# Altium PCB ESC.PcbDoc
Units mm, origin at the board's own origin, x right, y up, seen from the top; angles counter-clockwise.
Board outline 52.2 x 43.55 mm, 2 copper layers (TL, BL), stack 0.872 mm thick; 68 components, 44 nets, 233 pads, 305 vias.
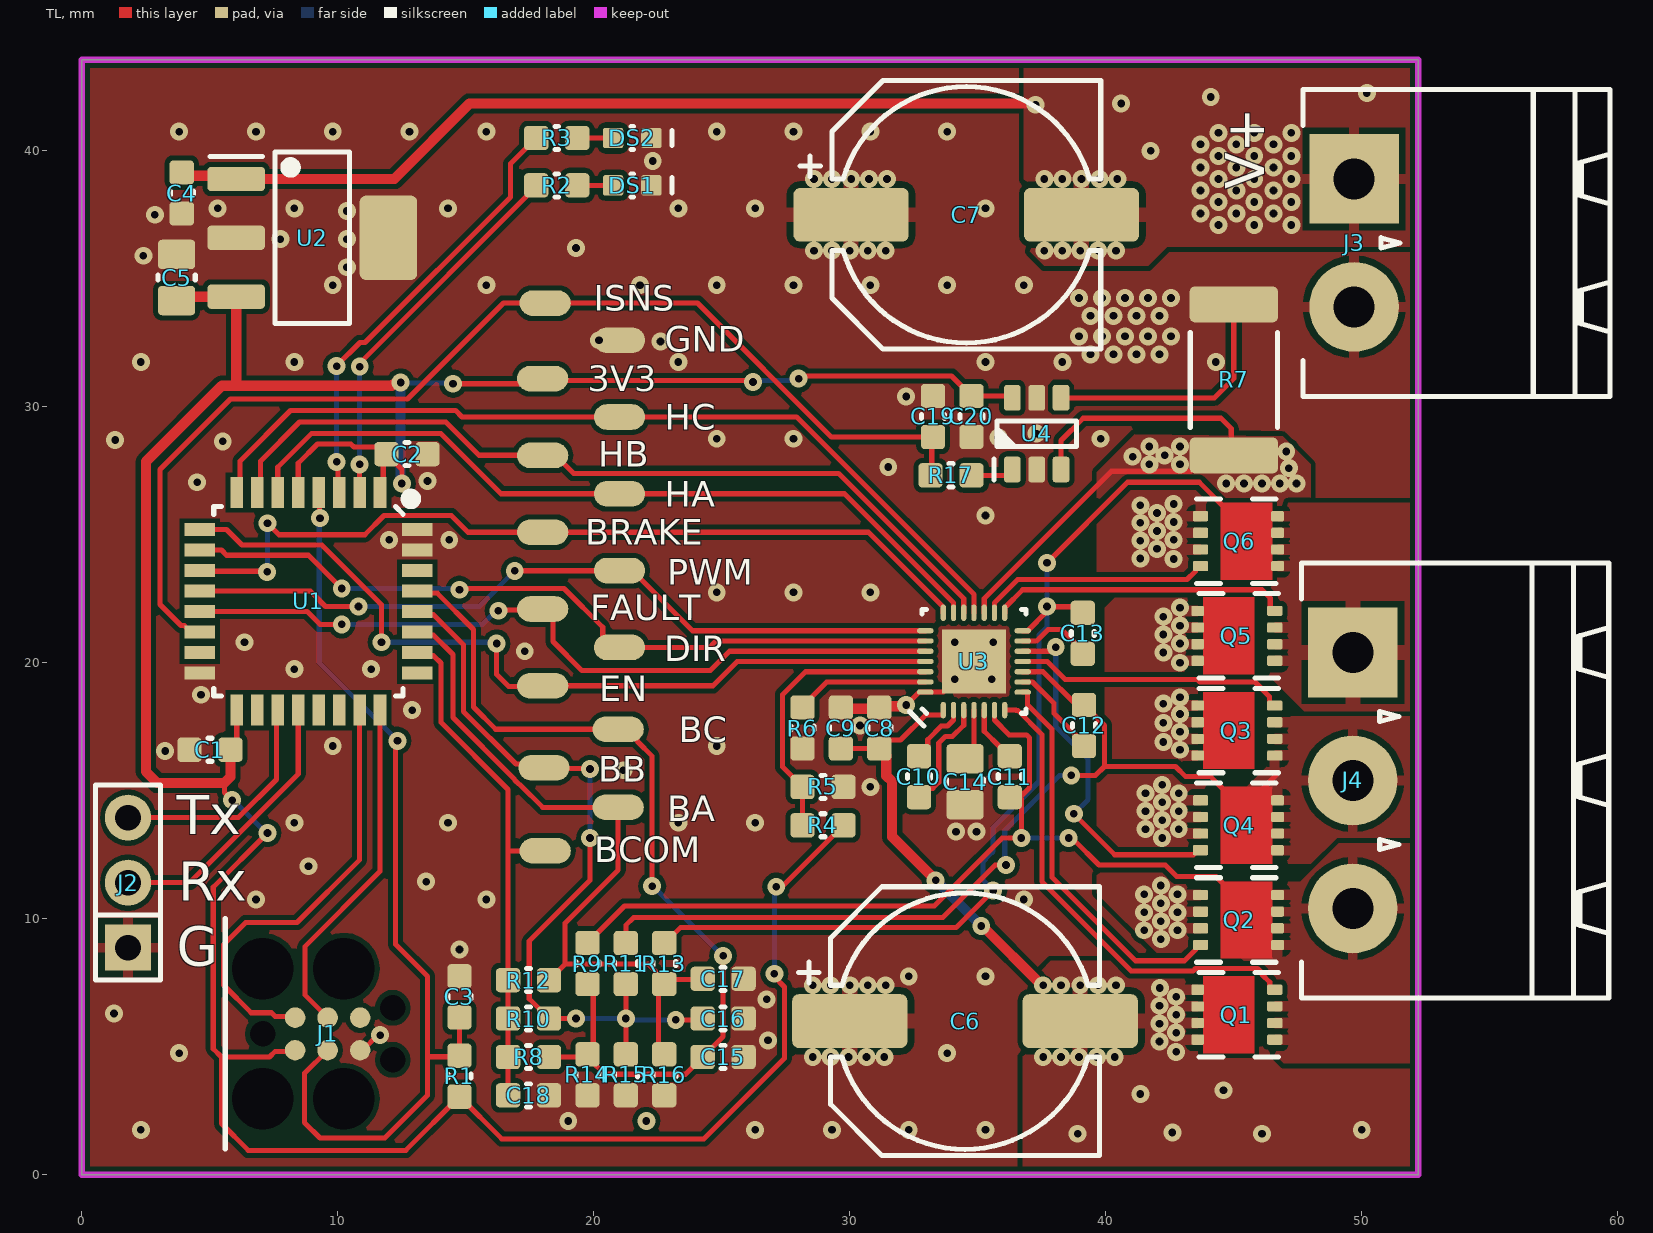
[diagram p0: TL view]
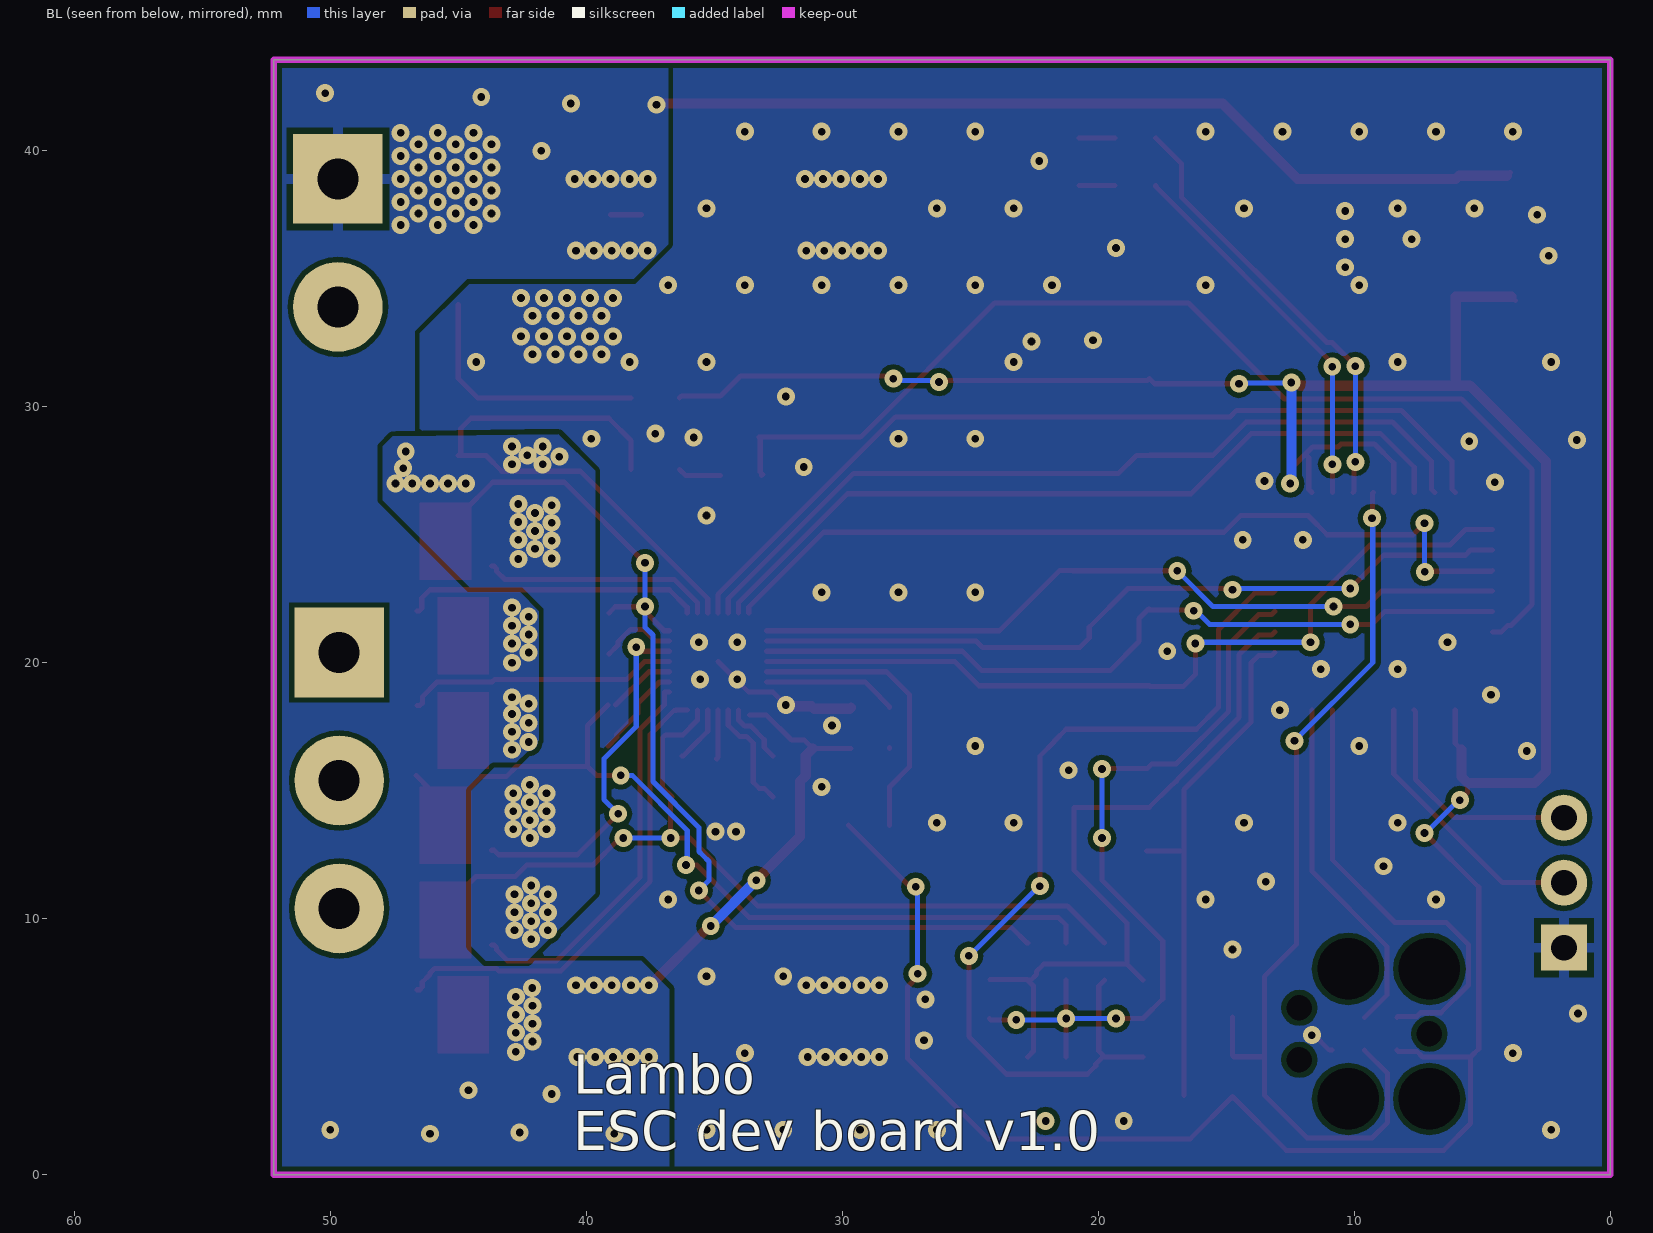
[diagram p1: BL view, seen from below]
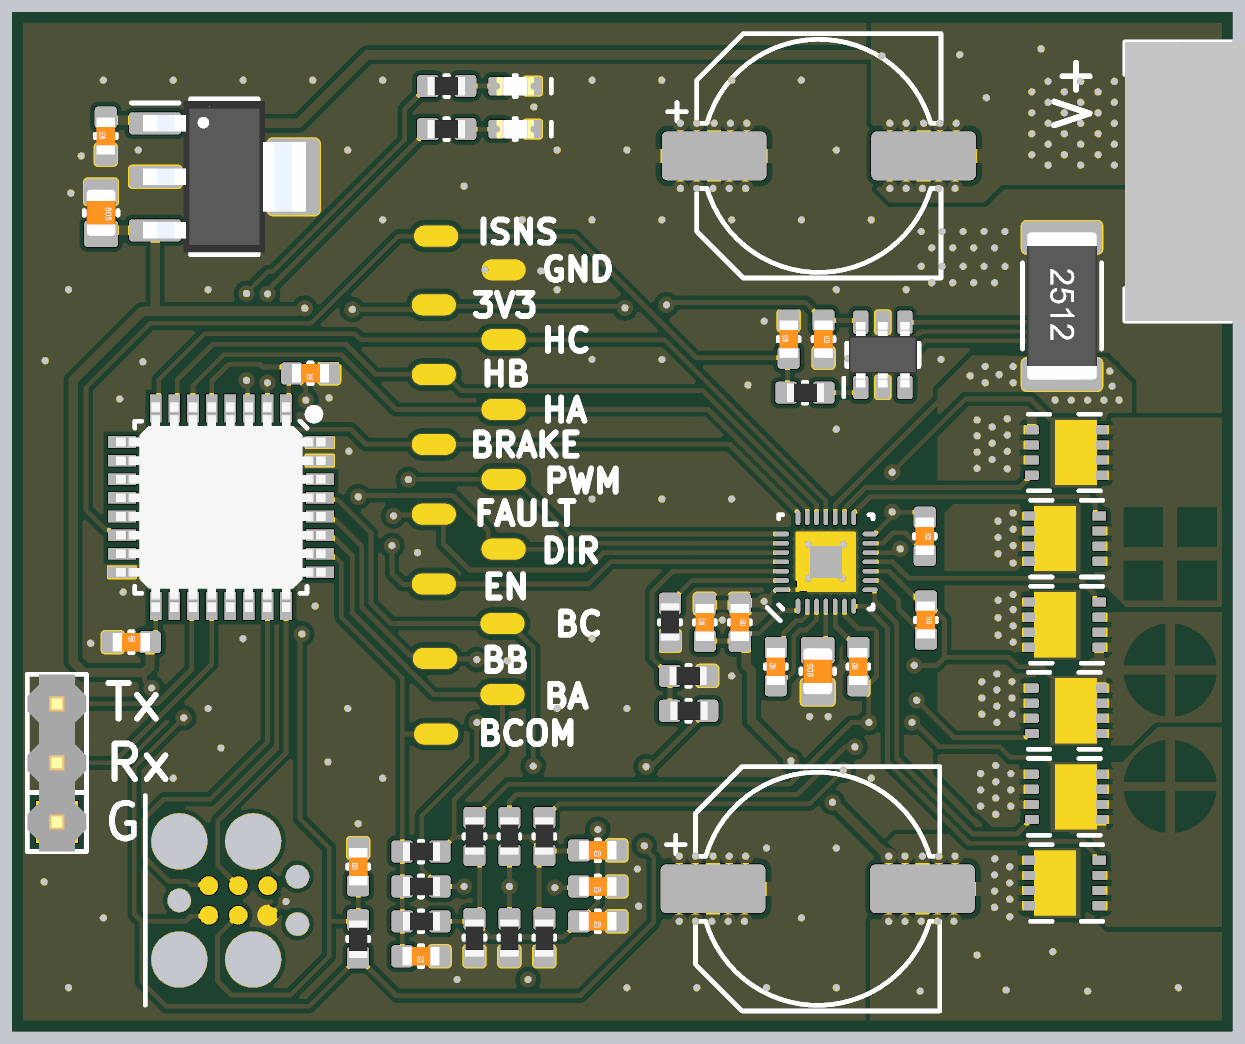
[diagram p2: 3D render of the assembled board from above, using the file's embedded part models]

## Layer stack, top to bottom
Top Solder: solder mask 0.01, Solder Resist, Dk 3.5
TL: signal copper 0.036
Dielectric 4: prepreg 0.8, FR-4, Dk 4.2
BL: signal copper 0.036
Bottom Solder: solder mask 0.01, Solder Resist, Dk 3.5

## Board outline
0,0 0,43.55 52.2,43.55 52.2,0

## Design rules (kind name [scope] priority, off if disabled: settings)
Clearance [All] p1: gap=0.2 ignorepadtopadclearanceinfootprint=FALSE except(0: Arc-Hole Track-Hole SMDPad-Hole THPad-Hole Via-Hole Fill-Hole Poly-Hole Region-Hole Text-Hole)
DiffPairsRouting DiffPairsRouting_1 [InDifferentialPair('D')] p1: maxlimit=0.4 minlimit=0.2 mostfreqgap=0.2 toplayer_minwidth=0.2 toplayer_maxwidth=0.4 toplayer_prefwidth=0.4 bottomlayer_minwidth=0.2 bottomlayer_maxwidth=0.4 bottomlayer_prefwidth=0.4 maxuncoupledlength=12.7
DiffPairsRouting [All] p2: maxlimit=0.254 minlimit=0.254 mostfreqgap=0.254 toplayer_minwidth=0.381 toplayer_maxwidth=0.381 toplayer_prefwidth=0.381 bottomlayer_minwidth=0.381 bottomlayer_maxwidth=0.381 bottomlayer_prefwidth=0.381 maxuncoupledlength=12.7
HoleSize [All] p1: absolutevalues=TRUE maxlimit=10 minlimit=0.3 maxpercent=80.000 minpercent=20.000
MinimumSolderMaskSliver MinimumSolderMaskSliver_1 [HasFootprint('QFN65P400X400X90_HS-16N')] p1: minsoldermaskwidth=0.08
MinimumSolderMaskSliver [All] p2: minsoldermaskwidth=0.1
PolygonConnect [All] p1: thpad.connectstyle=Relief thpad.reliefconductorwidth=0.4 thpad.reliefentries=4 thpad.polygonreliefangle="90 Angle" thpad.airgapwidth=0.254 smdpad.connectstyle=Direct smdpad.reliefconductorwidth=0.254 smdpad.reliefentries=4 smdpad.polygonreliefangle="90 Angle" smdpad.airgapwidth=0.254 via.connectstyle=Direct via.reliefconductorwidth=0.254 via.reliefentries=4 via.polygonreliefangle="90 Angle" via.airgapwidth=0.254
RoutingVias [All] p1: holewidth=0.3 width=0.7 viastyle="Through Hole" minholewidth=0.3 minwidth=0.5 maxholewidth=1 maxwidth=2
SilkToSilkClearance [All] p1: silktosilkclearance=0
SilkToSolderMaskClearance [IsPad] p1: minsilkscreentomaskgap=0.1 clearancetoexposedcopper=TRUE
SolderMaskExpansion [All] p1: expansion=0.05 istentingtop=FALSE
Width [All] p1: maxlimit=10 minlimit=0.2 preferedwidth=0.254
25 further rules are at their usual default settings.

## Classes and differential pairs
component class MCU: 3V3 BA BB BC BCOM BRAKE C1 C2 C3 C4 C5 DIR DS1 DS2 EN FAULT GND HA HB HC ISNS J1 J2 PWM R1 R2 R3 U2
component class ESC: C6 C7 C8 C9 C10 C11 C12 C13 C14 C15 C16 C17 C18 C19 C20 J3 J4 Q1 Q2 Q3 Q4 Q5 Q6 R4 R5 R6 R7 R8 R9 R10 R11 R12 R13 R14 R15 R16 R17 U3 U4

## Components (designator, comment, footprint, x,y, rotation, side; value= is the part's Value field where it differs from the comment)
3V3 "TP_SMT" TP_100X200 18,31.1 r180 top (schematic designator TP_3V3)
BA "TP_SMT" TP_100X200 20.95,14.35 r180 top (schematic designator TP_BA)
BB "TP_SMT" TP_100X200 18.05,15.9 r180 top (schematic designator TP_BB)
BC "TP_SMT" TP_100X200 20.95,17.4 r0 top (schematic designator TP_BC)
BCOM "TP_SMT" TP_100X200 18.1,12.65 r180 top (schematic designator TP_BCOM)
BRAKE "TP_SMT" TP_100X200 18,25.1 r180 top (schematic designator TP_BRAKE)
C1 "100nF,50V" CAPC1608X09N_0603 5,16.6 r0 top
C2 "100nF,50V" CAPC1608X09N_0603 12.7,28.15 r180 top
C3 "100nF,50V" CAPC1608X09N_0603 14.75,6.95 r90 top
C4 "1uF,50V" CAPC1608X09N_0603 3.9,38.35 r90 top
C5 "10uF,16V" CAPC2012X12N_0805 3.7,35.05 r270 top
C6 "100uF,63V" CAPAE1030X1020N 34.5,6 r0 top
C7 "100uF,63V" CAPAE1030X1020N 34.55,37.5 r0 top
C8 "1uF,50V" CAPC1608X09N_0603 31.15,17.45 r270 top
C9 "100nF,50V" CAPC1608X09N_0603 29.65,17.45 r90 top
C10 "470nF,50v" CAPC1608X09N_0603 32.7,15.55 r90 top
C11 "100nF,50V" CAPC1608X09N_0603 36.25,15.55 r90 top
C12 "100nF,50V" CAPC1608X09N_0603 39.15,17.55 r270 top
C13 "100nF,50V" CAPC1608X09N_0603 39.1,21.15 r270 top
C14 "10uF,16V" CAPC2012X12N_0805 34.5,15.35 r90 top
C15 "100pF,50V" CAPC1608X09N_0603 25.05,4.6 r180 top
C16 "100pF,50V" CAPC1608X09N_0603 25.05,6.1 r180 top
C17 "100pF,50V" CAPC1608X09N_0603 25.05,7.65 r180 top
C18 "100pF,50V" CAPC1608X09N_0603 17.45,3.1 r180 top
C19 "100nF,50V" CAPC1608X09N_0603 33.25,29.622 r90 top
C20 "100nF,50V" CAPC1608X09N_0603 34.75,29.622 r270 top
DIR "TP_SMT" TP_100X200 21,20.6 r180 top (schematic designator TP_DIR)
DS1 "GRN-0603" LED_SML-LX0603 21.5,38.65 r180 top
DS2 "GRN-0603" LED_SML-LX0603 21.5,40.5 r180 top
EN "TP_SMT" TP_100X200 18,19.1 r180 top (schematic designator TP_EN)
FAULT "TP_SMT" TP_100X200 18,22.1 r0 top (schematic designator TP_FAULT)
GND "TP_SMT" TP_100X200 21,32.6 r180 top (schematic designator TP_GND)
HA "TP_SMT" TP_100X200 21,26.6 r180 top (schematic designator TP_HA)
HB "TP_SMT" TP_100X200 18,28.1 r180 top (schematic designator TP_HB)
HC "TP_SMT" TP_100X200 21,29.6 r180 top (schematic designator TP_HC)
ISNS "TP_SMT" TP_100X200 18.1,34.05 r180 top (schematic designator TP_ISNS)
J1 "" TAG-CONNECT_TC2030-IDC 9.6,5.5 r0 top
J2 "HEADER 1X3" HIROSE_A2-3PA-2.54DSA 1.8,11.41 r180 top
J3 "OSTOQ027151" ONSHORE_OSTOQ027151 53.7,36.4 r90 top
J4 "OSTOQ037151" ONSHORE_OSTOQ037151 59.65,15.4 r90 top
PWM "TP_SMT" TP_100X200 21,23.6 r180 top (schematic designator TP_PWM)
Q1 "RQ3E100BNTB" ROHM-HSMT8 45.2,6.25 r180 top
Q2 "RQ3E100BNTB" ROHM-HSMT8 45.1,9.95 r0 top
Q3 "RQ3E100BNTB" ROHM-HSMT8 45.2,17.35 r180 top
Q4 "RQ3E100BNTB" ROHM-HSMT8 45.1,13.65 r0 top
Q5 "RQ3E100BNTB" ROHM-HSMT8 45.2,21.05 r180 top
Q6 "RQ3E100BNTB" ROHM-HSMT8 45.1,24.75 r0 top
R1 "10K,1%" RESC1608X06N_0603 14.75,3.85 r270 top
R2 "470R,1%" RESC1608X06N_0603 18.55,38.65 r180 top
R3 "470R,1%" RESC1608X06N_0603 18.55,40.5 r180 top
R4 "220K,1%" RESC1608X06N_0603 28.95,13.65 r0 top
R5 "100K,1%" RESC1608X06N_0603 28.95,15.15 r180 top
R6 "220K,1%" RESC1608X06N_0603 28.15,17.45 r90 top
R7 "1R2,5%" RESC6432X07N_2512 45,31.05 r270 top
R8 "47K, 1%" RESC1608X06N_0603 17.45,4.6 r0 top
R9 "47K, 1%" RESC1608X06N_0603 19.75,8.25 r90 top
R10 "47K, 1%" RESC1608X06N_0603 17.45,6.1 r0 top
R11 "47K, 1%" RESC1608X06N_0603 21.25,8.25 r90 top
R12 "47K, 1%" RESC1608X06N_0603 17.45,7.6 r0 top
R13 "47K, 1%" RESC1608X06N_0603 22.75,8.25 r90 top
R14 "10K,1%" RESC1608X06N_0603 19.75,3.9 r270 top
R15 "10K,1%" RESC1608X06N_0603 21.25,3.9 r270 top
R16 "10K,1%" RESC1608X06N_0603 22.75,3.9 r270 top
R17 "10K,1%" RESC1608X06N_0603 33.95,27.322 r0 top
U1 "STM32L051K8T6" LQFP32 8.85,22.4 r270 top
U2 "MCP1824ST-3302E/DB" SOT230P700X180-4N_SOT223-3 9,36.6 r0 top
U3 "MP6532" QFN40P400X400X100-28N_28QFN 34.85,20.05 r90 top
U4 "INA181A1" SOT95P280X145-6N_SOT23-6 37.3,28.95 r90 top

## Footprints (in the part's own frame and the unit in brackets; to place one, negate y for a bottom-side part, rotate by r counter-clockwise, add the part's x,y. Pads: shape width x height; smd on the part's side, far side on the other; paste and mask are expansions set on the pad)
CAPAE1030X1020N [mm] "Aluminum Electrolytic SMD 10.3mm body size, 10.2mm height size code G"
  rrect24% 4.5x2.1 smd: 1(-4.5,0) 2(4.5,0)
  silkscreen extent -6.5,-5.25 5.25,5.25, body extent -5.25,-5.25 5.25,5.25, height 10
CAPC1608X09N_0603 [mm] "Chip Capacitor, 2-Leads, Body 1.6x0.8mm, IPC Medium Density"
  rrect32% 0.95x0.95 smd: 1(-0.8,0) 2(0.8,0)
  silkscreen extent -0.08,-0.45 0.08,0.45, body extent -0.8,-0.4 0.8,0.4, height 0.3
CAPC2012X12N_0805 [mm] "Chip Capacitor, 2-Leads, Body 2.0x1.2mm, IPC Medium Density"
  rrect26% 1.15x1.45 smd: 1(-0.9,0) 2(0.9,0)
  silkscreen extent -0.1,-0.72 0.1,0.72, body extent -1,-0.62 1,0.63, height 0.78
HIROSE_A2-3PA-2.54DSA [mm] "HEADER 0.1\" x3"
  rect 1.8x1.8 hole 1 mask+0.05: 1(0,2.54)
  round 1.8 hole 1 mask+0.05: 2(0,0) 3(0,-2.54)
  silkscreen extent -1.27,-3.81 1.27,3.81, body extent -1.27,-3.81 1.27,3.81, height 8.54
LED_SML-LX0603 [mm] "Chip led, 2-Leads, Body 1.6x0.8mm, IPC Medium Density"
  rrect25% 0.8x0.8 smd: 1(-0.75,0) 2(0.75,0)
  silkscreen extent -1.55,-0.45 0.05,0.45, body extent -0.8,-0.4 0.8,0.4, height 0.63
LQFP32 [mm] "Low Profile Quad Flat Pack"
  rect 1.2x0.5 smd: 1(-4.25,2.8) 2(-4.25,2) 3(-4.25,1.2) 4(-4.25,0.4) 5(-4.25,-0.4) 6(-4.25,-1.2) 7(-4.25,-2) 8(-4.25,-2.8) 17(4.25,-2.8) 18(4.25,-2) 19(4.25,-1.2) 20(4.25,-0.4) 21(4.25,0.4) 22(4.25,1.2) 23(4.25,2) 24(4.25,2.8)
  rect 0.5x1.2 smd: 9(-2.8,-4.25) 10(-2,-4.25) 11(-1.2,-4.25) 12(-0.4,-4.25) 13(0.4,-4.25) 14(1.2,-4.25) 15(2,-4.25) 16(2.8,-4.25) 25(2.8,4.25) 26(2,4.25) 27(1.2,4.25) 28(0.4,4.25) 29(-0.4,4.25) 30(-1.2,4.25) 31(-2,4.25) 32(-2.8,4.25)
  silkscreen extent -4.2,-3.7 3.7,4.2, body extent -4.5,-4.5 4.5,4.5, height 1.63
ONSHORE_OSTOQ027151 [mm] "TERMINAL BLOCK HDR 5MM 4POS PCB"
  rect 3.5x3.5 hole 1.6: 1(2.5,4)
  round 3.5 hole 1.6: 2(-2.5,4)
  silkscreen extent -6,-6 6,6, body extent -6,-6 6,6, height 8.57
ONSHORE_OSTOQ037151 [mm] "TERMINAL BLOCK HDR 5MM 4POS PCB"
  rect 3.5x3.5 hole 1.6: 1(5,10)
  round 3.5 hole 1.6: 2(0,10) 3(-5,10)
  silkscreen extent -8.5,0 8.5,12, body extent -8.5,0 8.5,12, height 8.57
QFN40P400X400X100-28N_28QFN [mm] "QFN, 28-Leads, Body 4.1x4.1mm (max), Pitch 0.45mm, IPC Medium Density"
  oval 0.65x0.2 smd: 1(-1.9,1.2) 2(-1.9,0.8) 3(-1.9,0.4) 4(-1.9,0) 5(-1.9,-0.4) 6(-1.9,-0.8) 7(-1.9,-1.2) 15(1.9,-1.2) 16(1.9,-0.8) 17(1.9,-0.4) 18(1.9,0) 19(1.9,0.4) 20(1.9,0.8) 21(1.9,1.2)
  oval 0.2x0.65 smd: 8(-1.2,-1.9) 9(-0.8,-1.9) 10(-0.4,-1.9) 11(0,-1.9) 12(0.4,-1.9) 13(0.8,-1.9) 14(1.2,-1.9) 22(1.2,1.9) 23(0.8,1.9) 24(0.4,1.9) 25(0,1.9) 26(-0.4,1.9) 27(-0.8,1.9) 28(-1.2,1.9)
  rect 2.5x2.5 smd paste-0.56: 29(0,0)
  silkscreen extent -2.52,-2.02 2.02,2.52, body extent -2.02,-2.02 2.02,2.02, height 1
RESC1608X06N_0603 [mm] "Chip Resistor, 2-Leads, Body 1.6x0.8mm, IPC Medium Density"
  rrect32% 0.95x0.95 smd: 1(-0.8,0) 2(0.8,0)
  silkscreen extent -0.08,-0.45 0.08,0.45, body extent -0.78,-0.4 0.82,0.4, height 0.4
RESC6432X07N_2512 [mm] "Chip Resistor, 2-Leads, Body 6.4x3.2mm, IPC Medium Density"
  rrect29% 1.4x3.45 smd mask+0.05: 1(-2.95,0) 2(2.95,0)
  silkscreen extent -1.85,-1.7 1.85,1.7, body extent -3.17,-1.5 3.18,1.5, height 1.6
ROHM-HSMT8 [mm] "MOSFET N CH 60V 34.5A 8DFN"
  rrect29% 0.6x0.4 smd mask+0.05: 1(-1.4,0.975) 2(-1.4,0.325) 3(-1.4,-0.325) 4(-1.4,-0.975)
  rrect29% 0.5x0.4 smd mask+0.05: 5(1.61,-0.975) 6(1.61,-0.325) 7(1.61,0.325) 8(1.61,0.975)
  TL region: 1.4,1.19 1.4,0.76 1.4,0.54 1.4,0.11 1.4,-0.11 1.4,-0.54 1.4,-0.76 1.4,-1.19 1.4,-1.5 -0.6,-1.5 -0.6,1.5 1.4,1.5
  silkscreen extent -1.55,-1.65 1.55,1.65, body extent -1.5,-1.65 1.5,1.65, height 0.9
SOT95P280X145-6N_SOT23-6 [mm] "SOT23, 6-Leads, Body 3.1x2.8mm (max), Pitch 0.95mm, IPC Medium Density"
  rrect31% 1x0.65 smd mask+0.05: 1(-1.4,0.95) 2(-1.4,0) 3(-1.4,-0.95) 4(1.4,-0.95) 5(1.4,0) 6(1.4,0.95)
  silkscreen extent -1.8,-1.55 0.5,1.68, body extent -1.4,-1.46 1.4,1.46, height 1.4
SOT230P700X180-4N_SOT223-3 [mm] "SOT223, 4-Leads, Body 6.7x7.3mm (max), Pitch 2.30mm, IPC Medium Density"
  rrect32% 2.25x0.95 smd: 1(-2.975,2.3) 2(-2.975,0) 3(-2.975,-2.3)
  rrect22% 2.25x3.3 smd: 4(2.975,0)
  silkscreen extent -4,-3.35 1.45,3.35, body extent -3.5,-3.25 3.5,3.25, height 1.8
TAG-CONNECT_TC2030-IDC [mm]
  round 0 hole 2.4: 0(-2.54,-2.54) 0(-2.54,2.54) 0(0.635,-2.54) 0(0.635,2.54)
  round 0.8 hole 1: 0(-2.54,0)
  round 0 hole 1: 0(2.54,-1.016) 0(2.54,1.016)
  round 0.8 smd paste-0.5: 1(-1.27,-0.635) 2(-1.27,0.635) 3(0,-0.635) 4(0,0.635) 5(1.27,-0.635) 6(1.27,0.635)
  silkscreen extent -4,-4.5 -4,4.5
TP_100X200 [mm]
  oval 2x1 smd paste-5 mask-0.05: 1(0,0)

## Part data
3V3 BA BB BC BCOM BRAKE DIR EN FAULT GND HA HB HC ISNS PWM: library part NONPART-060, "Test Point - SMT", BWA PN=NONPART-060, Display_Name=TP_SMT, Schematic Symbol=TP_1
C1 C2 C3 C9 C11 C12 C13 C19 C20: library part CCH-104CH-G, "CAP CER 0.1UF 50V 10% X7R 0603", Capacitance=100nF, Dielectric=X7R, Manufacturer=Kemet, Manufacturer Part Number=C0603C104K5RACTU, Supplier Part Number 1=399-5089-1-ND, Tolerance=10%, Voltage=50V, BWA PN=CCH-104CH-G, Display_Name=100nF,50V, Schematic Symbol=CAP-NP_1, Supplier 1=Digi-Key, Type=Ceramic
C4 C8: library part CCH-106DH-G-A, "AUTOMOTIVE CAP CER 1UF 50V 10% X5R 0603", Capacitance=1uF, Dielectric=X5R, Manufacturer="TDK Corporation", Manufacturer Part Number=CGA3E3X5R1H105K080AB, Supplier Part Number 1=445-7878-1-ND, Tolerance=10%, Voltage=50V, BWA PN=CCH-106DH-G-A, Display_Name=1uF,50V, Schematic Symbol=CAP-NP_1, Supplier 1=Digi-Key, Type=Ceramic
C5 C14: library part CCI-106CE-G, "CAP CER 10µF ±10% 16V X7R 0805", Capacitance=10uF, Dielectric=X7R, Manufacturer="Samsung Electro-Mechanics America, Inc.", Manufacturer Part Number=CL21B106KOQNNNG, Supplier Part Number 1=1276-6472-1-ND, Tolerance=10%, Voltage=16V, BWA PN=CCI-106CE-G, Display_Name=10uF,16V, Schematic Symbol=CAP-NP_1, Supplier 1=Digi-Key, Type=Ceramic
C6 C7: library part CEG-1070T-H, "CAP ALUM 100UF 63V 20% SMD", Capacitance=100uF, Dielectric=Aluminium, Manufacturer="Panasonic Electronic Components", Manufacturer Part Number=EEE-FK1J101P, Supplier Part Number 1=PCE3819CT-ND, Tolerance=20%, Voltage=63V, BWA PN=CEG-1070T-H, Display_Name=100uF,63V, Schematic Symbol=CAP-POL_1, Supplier 1=Digi-Key, Type=Electrolytic
C10: library part CCH-474DH-G-A, "AUTOMOTIVE CAP CER 470nF 50V 10% X5R 0603", Capacitance=470nF, Dielectric=X5R, Manufacturer="Taiyo Yuden", Manufacturer Part Number=UMK107BJ474KAHT, Supplier Part Number 1=587-3506-1-ND, Tolerance=10%, Voltage=50V, BWA PN=CCH-474DH-G-A, Display_Name=470nF,50v, Schematic Symbol=CAP-NP_1, Supplier 1=Digi-Key, Type=Ceramic
C15 C16 C17 C18: library part CCH-101AH-G, "CAP CER 100PF 50V 10% NP0 0603", Capacitance=100pF, Dielectric=C0G,NP0, Manufacturer=AVX, Manufacturer Part Number=06035A101KAT2A, Supplier Part Number 1=478-3717-1-ND, Tolerance=10%, Voltage=50V, BWA PN=CCH-101AH-G, Display_Name=100pF,50V, Schematic Symbol=CAP-NP_1, Supplier 1=Digi-Key, Type=Ceramic
DS1 DS2: library part LED-10087-A, "LED GREEN CLEAR 0603 SMD", Colour=GREEN, Manufacturer=Dialight, Manufacturer Part Number=5988081107F, Supplier Part Number 1=350-2036-1-ND, Axial Intensity=300mcd, BWA PN=LED-10087-A, Display_Name=GRN-0603, If(max)=20mA, Lens Style/Size=0603, Lens type=clear, Schematic Symbol=LED_1, Supplier 1=Digi-Key, Vf@I=3.2V, Viewing Angle=140, Vr(max)=-, Wavelength=523nm
J1: library part NONPART-051, "Tag connect 6 way", BWA PN=NONPART-051, Schematic Symbol=TAGCON_TC2030-IDC
J2: library part CON-10038-A, "CONN 3-pin 2.54mm pitch TH single row", Manufacturer=Hirose, Manufacturer Part Number=A2-3PA-2.54DSA, BWA PN=CON-10038-A, Contacts=3, Display_Name="HEADER 1X3", Pitch=2.54mm, Rows=1, Schematic Symbol=HIROSE_A2-3PA-2.54DSA, Type=HEADER
J3: library part CON-10606-A, "TERM BLOCK HDR 2POS R/A 5MM", Manufacturer="On Shore Technology Inc", Supplier Part Number 1=ED2791-ND, BWA PN=CON-10606-A, Contacts=2, Display_Name=OSTOQ027151, Manufacturer Part Number=OSTOQ027151, Pitch=5.0, Rows=1, Schematic Symbol=ONSHORE_OSTOQ027151, Series=OQ, Supplier 1=Digi-Key, Type=HEADER
J4: library part CON-10607-A, "TERM BLOCK HDR 3POS R/A 5MM", Manufacturer="On Shore Technology Inc", Supplier Part Number 1=ED2792-ND, BWA PN=CON-10607-A, Contacts=3, Display_Name=OSTOQ037151, Manufacturer Part Number=OSTOQ037151, Pitch=5.0, Rows=1, Schematic Symbol=ONSHORE_OSTOQ037151, Series=OQ, Supplier 1=Digi-Key, Type=HEADER
Q1 Q2 Q3 Q4 Q5 Q6: library part TRN-10123-A, "MOSFET N-CH 30V 10A 8HSMT", Manufacturer="Rohm Semiconductor", Supplier Part Number 1=RQ3E100BNTBCT-ND, BWA PN=TRN-10123-A, Display_Name=RQ3E100BNTB, Id(max)=10A, Manufacturer Part Number=RQ3E100BNTB, rds(on)="10.4mOhm @ 10A, 10V", Schematic Symbol=MOSFET-N-QFN8, Supplier 1=Digi-Key, Type=N, Vds(max)=30V, Vgs(max)=±20V, Vth(max)="2.5V @ 1mA"
R1 R14 R15 R16 R17: library part RSH-10K00-D, "RES 10.0K OHM 1/10W 1% 0603 SMD", Manufacturer=Yageo, Manufacturer Part Number=RC0603FR-0710KL, Power=0.1W, Resistance=10K, Supplier Part Number 1=311-10.0KHRCT-ND, Tolerance=1%, BWA PN=RSH-10K00-D, Display_Name=10K,1%, Schematic Symbol=RESISTOR_1, Supplier 1=Digi-Key, Type=Chip
R2 R3: library part RSH-470R0-D, "RES 470 OHM 1/10W 1% 0603 SMD", Manufacturer="Rohm Semiconductor", Manufacturer Part Number=MCR03EZPFX4700, Power=0.1W, Resistance=470R, Supplier Part Number 1=RHM470HCT-ND, Tolerance=1%, BWA PN=RSH-470R0-D, Display_Name=470R,1%, Schematic Symbol=RESISTOR_1, Supplier 1=Digi-Key, Type=Chip
R4 R6: library part RSH-220K0-D, "RES 220K OHM 1/10W 1% 0603 SMD", Manufacturer=Yageo, Manufacturer Part Number=RC0603FR-07220KL, Power=0.1W, Resistance=220K, Supplier Part Number 1=311-220KHRCT-ND, Tolerance=1%, BWA PN=RSH-220K0-D, Display_Name=220K,1%, Schematic Symbol=RESISTOR_1, Supplier 1=Digi-Key, Type=Chip
R5: library part RSH-100K0-D, "RES 100K OHM 1/10W 1% 0603 SMD", Manufacturer=Yageo, Manufacturer Part Number=RC0603FR-07100KL, Power=0.1W, Resistance=100K, Supplier Part Number 1=311-100KHRCT-ND, Tolerance=1%, BWA PN=RSH-100K0-D, Display_Name=100K,1%, Schematic Symbol=RESISTOR_1, Supplier 1=Digi-Key, Type=Chip
R7: library part RSV-1R200-F, "RES SMD 1.2 OHM 5% 3W 2512", Manufacturer="TE Connectivity Passive Product", Manufacturer Part Number=35221R2JT, Power=3W, Resistance=1R2, Supplier Part Number 1=A121178CT-ND, Tolerance=5%, BWA PN=RSV-1R200-F, Display_Name=1R2,5%, Schematic Symbol=RESISTOR_1, Supplier 1=Digi-Key, Type=Chip
R8 R9 R10 R11 R12 R13: library part RSH-47K00-D-A, "AUTOMOTIVE RES 47.0K OHM 1/10W 1% 0603 SMD", Manufacturer="Vishay Dale", Manufacturer Part Number=CRCW060347K0FKEA, Power=0.1W, Resistance=47k, Supplier Part Number 1=541-47.0KHCT-ND, Tolerance=1%, BWA PN=RSH-47K00-D-A, Display_Name="47K, 1%", Schematic Symbol=RESISTOR_1, Supplier 1=Digi-Key, Type=Chip
U1: library part ICT-10696-A, "32 Bit Mcirocontroler", Manufacturer="ST Microelectronics", Supplier Part Number 1=497-14901-ND, Temp Range="-40°C ~ 85°C", BWA PN=ICT-10696-A, Display_Name=STM32L051K8T6, Manufacturer Part Number=STM32L051K8T6, Schematic Symbol=STM32L051x6/8, Supplier 1=Digi-Key
U2: library part ICT-10417-A, "IC LDO REG 300MA 3.3V SOT223-3", Manufacturer="Microchip Technology", Supplier Part Number 1=MCP1824ST-3302E/DBCT-ND, Temp Range="-40°C ~ 125°C", BWA PN=ICT-10417-A, Display_Name=MCP1824ST-3302E/DB, Manufacturer Part Number=MCP1824ST-3302E/DB, Schematic Symbol=MCP1824ST_DB, Supplier 1=Digi-Key
U3: library part ICT-10928-A, "IC MOTOR DRIVER 5V-60V 28QFN", Manufacturer="Monolithic Power Systems Inc.", Manufacturer Part Number=MP6532-GR-Z, Supplier Part Number 1=589-MP6532-GR-ZCT-ND, Temp Range="-40°C ~ 125°C", BWA PN=ICT-10928-A, Display_Name=MP6532, Schematic Symbol=MP6532, Supplier 1=Digi-Key
U4: library part ICT-10756-A, "IC AMP CUR SENSE 350KHZ SOT23-6", Manufacturer="Texas Instruments", Manufacturer Part Number=INA181A1IDBVT, Supplier Part Number 1=296-46634-1-ND, Temp Range="-40°C ~ 125°C", BWA PN=ICT-10756-A, Display_Name=INA181A1, Schematic Symbol=INA181AX, Supplier 1=Digi-Key

## Via types
v1: diameter 0.7, hole 0.3, TL to BL, tented both sides, 305 vias

## Nets (pads, with @x,y where several pads share a name; then routed paths per layer and width w, separated by ;. In a path a pad name is that pad's centre, name@x,y a point inside that pad or via, vN(x,y) a via of type N, cw(c..) or ccw(c..) an arc to the next point about the centre after c; other vN are vias at no path point)
3V3: 3V3.1 C1.2 C2.2 C5.2 C20.1 J1.1 R1.2 R4.2 U1.1 U1.5 U1.17 U2.3 U4.6 | length 125.9
  TL w0.2: C5.2 C5.2@3.85,34.3 ; 5.566,15.3 5.566,14.934 v1(5.869,14.631) ; C1.2 6.05,16.85 U1.17 ; v1(7.25,13.35) 5.133,11.233 5.133,4.917 5.45,4.6 ; J1.1 8.284,4.819 7.549,4.819 7.329,4.6 5.45,4.6 ; U1.5 8.45,27.796 9.204,28.55 10.506,28.55 10.629,28.427 11.623,28.427 C2.2 ; U1.1 11.773,26.773 11.773,28.023 C2.2 ; v1(12.5,27) 12.5,27.55 C2.2 ; v1(14.5,30.9) 17.8,30.9 3V3.1 18.067,31.033 26.148,31.033 v1(26.215,30.965) ; v1(27.05,7.85) 27.05,7.731 27.45,7.331 27.45,4.55 24.3,1.4 16.4,1.4 R1.2 12.65,0.95 6.5,0.95 5.45,2 5.45,4.6 ; v1(27.125,11.25) 27.35,11.25 R4.2 ; v1(28,31.1) 28.135,31.1 28.232,31.197 33.975,31.197 C20.1 36.278,30.422 U4.6
  TL w0.4: C5.2@3.85,34.3 U2.3 6.025,30.817 ; C1.2 5.8,15.534 5.566,15.3 2.95,15.3 2.5,15.75 2.5,27.85 5.467,30.817 6.025,30.817 ; v1(12.45,30.95) 12.393,30.893 12.18,30.893 12.105,30.817 6.025,30.817
  BL w0.2: v1(5.869,14.631) 5.919,14.631 7.2,13.35 v1(7.25,13.35) ; v1@12.45,27.05 v1(12.5,27) ; v1(12.45,30.95) 12.475,30.925 14.475,30.925 v1(14.5,30.9) ; v1(26.215,30.965) 26.283,31.033 27.933,31.033 v1(28,31.1) ; v1(27.05,7.85) 27.05,11.175 v1(27.125,11.25)
  BL w0.4: v1@12.45,27.05 v1(12.45,30.95)
GND: C1.1 C2.1 C3.2 C4.1 C5.1 C6.1 C7.1 C8.1 C9.2 C14.1 C15.1 C16.1 C17.1 C18.1 C19.2 C20.2 DS1.1 DS2.1 GND.1 J1.5 J2.1 J3.2 R5.1 R6.1 R7.1 R14.2 R15.2 R16.2 U1.16 U1.31 U1.32 U2.2 U2.4 U3.28 U3.29 U4.2 U4.4 U4.5 | length 17.1
  TL w0.2: J1.5 10.967,4.865 11.552,5.45 v1(11.65,5.45) ; R6.1 R6.1@28.15,16.678 ; v1(32.2,18.35) 32.7,18.85 33.65,18.85 34.125,19.325 U3.29 ; U4.4 44.25,30.35 45,31.1 R7.1
  TL w0.4: C9.2 29.7,18.2 31.1,18.2 C8.1@31.2,18.3 ; C8.1 C8.1@31.2,18.3 ; v1(32.2,18.35) 32.15,18.3 C8.1@31.2,18.3
  other v1: 2.3,1.75 26.3,1.75 29.3,1.75 32.3,1.75 35.3,1.75 19,2.1 28.55,4.6 29.25,4.6 29.95,4.6 30.65,4.6 31.35,4.6 3.8,4.75 33.8,4.75 26.8,5.25 1.25,6.3 26.75,6.85 28.55,7.4 29.25,7.4 30,7.4 30.7,7.4 31.4,7.4 32.3,7.75 35.3,7.75 14.75,8.8 6.8,10.75 15.8,10.75 36.8,10.75 13.45,11.45 8.85,12.05 34.15,13.4 34.95,13.4 8.3,13.75 14.3,13.75 23.3,13.75 26.3,13.75 30.8,15.15 21.15,15.8 3.25,16.55 9.8,16.75 24.8,16.75 30.4,17.55 12.9,18.15 4.65,18.75 34.1,19.35 35.55,19.35 8.3,19.75 11.3,19.75 17.3,20.45 6.35,20.8 34.1,20.8 35.6,20.8 24.8,22.75 27.8,22.75 30.8,22.75 12,24.8 14.35,24.8 35.3,25.75 4.5,27.05 13.5,27.1 31.5,27.65 5.5,28.65 1.3,28.7 24.8,28.75 27.8,28.75 39.8,28.75 35.8,28.8 37.3,28.95 32.2,30.4 2.3,31.75 8.3,31.75 23.3,31.75 35.3,31.75 38.3,31.75 44.3,31.75 39.4,32.05 40.3,32.05 41.2,32.05 42.1,32.05 22.6,32.55 20.2,32.6 38.95,32.75 39.85,32.75 40.75,32.75 41.65,32.75 42.55,32.75 39.4,33.55 40.3,33.55 41.2,33.55 42.1,33.55 38.95,34.25 39.85,34.25 40.75,34.25 41.65,34.25 42.55,34.25 9.8,34.75 15.8,34.75 21.8,34.75 24.8,34.75 27.8,34.75 30.8,34.75 33.8,34.75 36.8,34.75 10.35,35.45 2.4,35.9 28.6,36.1 29.3,36.1 30,36.1 30.7,36.1 31.4,36.1 19.3,36.2 7.75,36.55 10.35,36.55 2.85,37.5 10.35,37.65 5.3,37.75 8.3,37.75 14.3,37.75 23.3,37.75 26.3,37.75 35.3,37.75 28.6,38.9 29.3,38.9 30.05,38.9 30.75,38.9 31.45,38.9 22.3,39.6 3.8,40.75 6.8,40.75 9.8,40.75 12.8,40.75 15.8,40.75 24.8,40.75 27.8,40.75 30.8,40.75 33.8,40.75
MTR_OUTA: C11.1 J4.3 Q1.1 Q1.2 Q1.3 Q2.5 Q2.6 Q2.7 Q2.8 R9.2 U3.6 | length 33.9
  TL w0.2: R9.2 21.2,10.5 33.3,10.5 35.95,13.15 v1(36.7,13.15) ; U3.6 35.65,17.759 36.228,17.181 36.908,17.181 37.025,17.064 37.025,15.125 36.65,14.75 36.7,14.7 v1@36.7,13.2 ; v1@38.75,13.085 39.735,12.1 42.323,12.1 42.773,11.65 44.3,11.65 45,10.95
  BL w0.2: v1(36.7,13.15) v1@38.75,13.15
  other v1: 38.55,13.15
MTR_OUTB: C12.1 J4.2 Q3.1 Q3.2 Q3.3 Q4.5 Q4.6 Q4.7 Q4.8 R11.2 U3.10 | length 35.5
  TL w0.2: R11.2 21.25,9.743 21.557,10.05 33.631,10.05 35.681,12.1 v1(36.1,12.1) ; U3.10 37.55,19.65 C12.1@38.85,18.35 ; v1(38.65,15.6) 39.6,15.6 39.95,15.95 ; C12.1 39.95,17.55 39.95,15.95 ; 46.65,15.6 46.099,15.049 44.601,15.049 44.1,15.55 43.676,15.55 43.119,15.55 42.719,15.95 39.95,15.95
  BL w0.2: v1(36.1,12.1) 36.05,12.15 36.05,13.45 38.2,15.6 v1(38.65,15.6)
MTR_OUTC: C13.1 J4.1 Q5.1 Q5.2 Q5.3 Q6.5 Q6.6 Q6.7 Q6.8 R13.2 U3.14 | length 39.4
  TL w0.2: R13.2 22.778,9.05 23.378,9.65 34.15,9.65 v1(35.6,11.1) ; U3.14 36.975,21.25 36.975,21.28 v1@37.648,21.952 ; v1(37.7,22.2) 37.714,22.186 38.864,22.186 C13.1 ; v1(37.7,23.9) 40.85,27.05 43.65,27.05 44.85,25.85
  BL w0.2: 35.45,12.482 35.2,12.232 35.2,11.5 v1(35.6,11.1) ; 35.45,12.483 35.595,12.628 35.595,12.804 35.6,12.809 35.6,13.566 37.394,15.36 37.394,21.079 37.7,21.385 v1(37.7,22.2) v1(37.7,23.9)
NetC10_1: C10.1 U3.3 | length 4.4
  TL w0.2: C10.1 33.043,15.093 33.239,15.093 33.475,15.329 33.475,16.862 33.738,17.125 33.981,17.125 34.016,17.125 34.45,17.559 U3.3
NetC10_2: C10.2 U3.2 | length 2.5
  TL w0.2: C10.2 33.043,16.693 33.043,16.995 33.573,17.525 33.816,17.525 34.05,17.759 U3.2
NetC11_2: C11.2 U3.5 | length 2.2
  TL w0.2: U3.5 35.25,17.319 35.844,16.725 35.847,16.725 36.222,16.35 C11.2
NetC12_2: C12.2 U3.9 | length 3.7
  TL w0.2: U3.9 37.141,19.25 37.974,18.417 37.974,18.026 38.807,17.193 38.807,17.093 C12.2
NetC13_2: C13.2 U3.13 | length 3
  TL w0.2: U3.13 37.3,20.85 37.75,21.3 38.274,21.3 38.757,20.817 38.757,20.693 C13.2
NetC14_2: C14.2 U3.4 | length 1.9
  TL w0.2: U3.4 34.85,16.3 C14.2@34.9,16.25
NetC15_2: BC.1 C15.2 R8.2 R9.1 R14.1 U1.29 | length 36.7
  TL w0.2: U1.29 13.183,22.717 13.883,22.717 15.3,21.3 15.3,18.266 16.166,17.4 21.248,17.4 21.706,16.942 21.706,16.918 22.277,16.347 v1(22.277,11.273) ; R8.2 R14.1@19.75,4.6 ; R9.1@19.75,7.6 19.977,7.373 19.977,4.827 R14.1@19.75,4.6 ; v1(25.05,8.55) 25.05,5.4 C15.2 23.575,3.925 20.425,3.925 20.093,4.257 20.093,4.329 19.822,4.6 R14.1@19.75,4.6
  BL w0.2: v1(22.277,11.273) 22.302,11.273 25.025,8.55 v1(25.05,8.55)
NetC16_2: BB.1 C16.2 R10.2 R11.1 R15.1 U1.28 | length 30.9
  TL w0.2: U1.28 13.223,21.877 13.735,21.877 14.9,20.713 14.9,18.1 16.959,16.041 17.909,16.041 18.075,15.875 19.825,15.875 v1(19.85,15.85) ; v1(19.3,6.1) R10.2 17.475,6.875 17.475,8.475 17.475,9.125 19.85,11.5 v1(19.85,13.15) ; R15.1@21.25,4.6 v1(21.25,6.1) R11.1@21.25,7.6 ; v1(23.2,6.05) 24.2,6.05 C16.2
  BL w0.2: v1(19.3,6.1) v1(21.25,6.1) 21.3,6.05 v1(23.2,6.05) ; v1(19.85,13.15) v1(19.85,15.85)
NetC17_2: BA.1 C17.2 R12.2 R13.1 R16.1 U1.27 | length 28.9
  TL w0.2: U1.27 13.223,21.077 13.735,21.077 14.492,20.321 14.492,17.858 16.868,15.482 ccw(c17.55,15.9) 17.132,15.218 18,14.35 BA.1 20.95,11.9 18.875,9.825 18.875,8.225 ; R12.2 18.875,8.225 ; R16.1@22.75,4.6 22.523,4.827 22.523,7.373 22.689,7.539 R13.1@22.75,7.6 ; C17.2@24.225,7.625 22.775,7.625 R13.1@22.75,7.6 ; 18.875,8.225 22.125,8.225 22.407,7.943 22.407,7.821 22.628,7.6 R13.1@22.75,7.6
NetC18_2: BCOM.1 C18.2 R8.1 R10.1 R12.1 U1.26 | length 20.5
  TL w0.2: U1.26 13.223,20.277 13.735,20.277 14.027,19.986 14.027,17.673 16.65,15.05 16.65,12.65 ; C18.2 R8.1 R10.1 R12.1 16.65,12.65 ; BCOM.1 16.65,12.65
NetC19_1: C19.1 ISNS.1 R17.1 U1.14 | length 43.9
  TL w0.2: U1.14 4.25,21.2 4,21.45 3.876,21.45 3.05,22.276 3.05,27.55 5.8,30.3 12.719,30.3 16.469,34.05 24.05,34.05 29.278,28.822 C19.1 33.2,28.772 33.2,27.45 33.1,27.35 33.122,27.35 R17.1
NetDS1_2: DS1.2 R2.1 | length 1.4
  TL w0.2: R2.1 DS1.2
NetDS2_2: DS2.2 R3.1 | length 1.4
  TL w0.2: R3.1 DS2.2
NetQ1_4: Q1.4 U3.7 | length 18.7
  TL w0.2: U3.7 36.484,18.15 36.494,18.14 36.56,18.14 37.5,17.2 37.5,11.45 40.994,7.956 43.412,7.956 43.506,8.05 45.924,8.05 46.1,7.874 46.1,7.821 46.403,7.518 46.403,7.325 46.503,7.225 Q1.4
NetQ2_1: Q2.1 Q2.2 Q2.3 Q4.1 Q4.2 Q4.3 Q6.1 Q6.2 Q6.3 R7.2 U3.17 U4.3 | length 22
  TL w0.2: U3.17 35.25,22.506 40.223,27.48 43.299,27.48 43.919,28.1 R7.2 44.9,28.2 44.9,29.15 44.5,29.55 39.117,29.55 38.25,28.683 U4.3
  other v1: 42.15,9.2 41.5,9.55 42.8,9.55 42.15,9.9 41.5,10.25 42.8,10.25 42.15,10.6 41.5,10.95 42.8,10.95 42.15,11.3 42.2,13.15 41.55,13.5 42.85,13.5 42.2,13.85 41.55,14.2 42.85,14.2 42.2,14.55 41.55,14.9 42.85,14.9 42.2,15.231 41.35,24.069 42.65,24.05 42,24.45 41.35,24.769 42.65,24.8 42,25.15 41.35,25.469 42.65,25.5 42,25.85 41.35,26.15 42.65,26.2 44.7,27 45.4,27 46.1,27 46.8,27 47.45,27 47.15,27.6 41.7,27.75 42.9,27.75 41.05,28.05 42.3,28.1 47.05,28.25 41.7,28.45 42.9,28.45
NetQ2_4: Q2.4 U3.8 | length 15.3
  TL w0.2: U3.8 36.945,18.85 36.945,18.355 37.9,17.4 37.9,11.616 41.16,8.356 43.069,8.356 43.5,8.787 43.5,8.875 43.6,8.975 Q2.4
NetQ3_4: Q3.4 U3.11 | length 10.7
  TL w0.2: U3.11 37.716,20.05 38.416,19.35 43.576,19.35 43.676,19.25 45.824,19.25 46.4,18.674 46.4,18.425 46.5,18.325 Q3.4
NetQ4_4: Q4.4 U3.12 | length 14.3
  TL w0.2: U3.12 37.883,20.45 v1(38.044,20.611) ; v1(38.75,14.1) 40.35,12.5 42.488,12.5 43.425,12.5 43.6,12.675 Q4.4
  BL w0.2: v1(38.044,20.611) 38.044,17.506 39.3,16.25 39.3,14.65 v1(38.75,14.1)
NetQ5_4: Q5.4 U3.15 | length 11.6
  TL w0.2: U3.15 36.05,22.175 36.08,22.175 36.755,22.85 46.1,22.85 46.425,22.525 46.425,22.125 46.525,22.025 Q5.4
NetQ6_4: Q6.4 U3.16 | length 9.1
  TL w0.2: U3.16 35.65,22.341 36.559,23.25 43.175,23.25 43.5,23.575 43.5,23.675 43.6,23.775 Q6.4
NetR2_2: R2.2 U1.2 | length 14.9
  TL w0.2: U1.2 v1(10.85,27.75) ; v1(10.853,31.567) 10.853,31.703 17.75,38.6 R2.2
  BL w0.2: v1(10.85,27.75) 10.85,31.565 v1(10.853,31.567)
NetR3_2: R3.2 U1.3 | length 17.3
  TL w0.2: v1(9.95,27.85) 10.01,27.85 10.011,27.852 10.006,27.847 10.006,26.694 U1.3 ; v1(9.95,31.585) 9.95,31.6 10.863,32.513 11.063,32.513 16.75,38.2 16.75,39.5 R3.2
  BL w0.2: v1(9.95,27.85) v1(9.95,31.585)
NetR4_1: R4.1 R5.2 U3.26 | length 11.4
  TL w0.2: R4.1 R5.2 27.375,15.925 27.375,18.76 28.265,19.65 U3.26
NetR6_2: R6.2 U3.27 | length 5.2
  TL w0.2: R6.2 28.15,18.278 28.525,18.653 28.525,18.675 29.1,19.25 U3.27
NetR17_2: R17.2 U4.1 | length 1.7
  TL w0.2: R17.2 36.125,27.322 36.35,27.547 U4.1
NetTP_BRAKE_1: BRAKE.1 U1.11 U3.21 | length 33.2
  TL w0.2: U1.11 4.625,23.575 7.211,23.575 v1(7.236,23.55) ; v1(7.25,25.45) 7.7,25 11.05,25 11.8,25.75 14.428,25.75 15.078,25.1 BRAKE.1 30.725,25.1 33.65,22.175 U3.21
  BL w0.2: v1(7.236,23.55) 7.236,23.6 7.243,23.607 7.243,25.443 v1(7.25,25.45)
NetTP_DIR_1: DIR.1 U1.10 U3.23 | length 30.3
  TL w0.2: U1.10 5.45,24.4 5.65,24.2 8.85,24.2 v1(10.15,22.9) ; v1(14.75,22.85) 14.8,22.9 18.831,22.9 20.347,21.384 20.347,20.97 20.716,20.6 DIR.1 24.521,20.6 24.771,20.85 U3.23
  BL w0.2: v1(10.15,22.9) 14.7,22.9 v1(14.75,22.85)
NetTP_EN_1: EN.1 U1.9 U3.25 | length 32.9
  TL w0.2: U1.9 5.65,25.2 6.25,24.6 9.369,24.6 11.7,22.269 v1(11.7,20.8) ; v1(16.2,20.75) 16.2,19.551 16.676,19.075 17.975,19.075 EN.1 24.65,19.1 25.6,20.05 U3.25
  BL w0.2: v1(11.7,20.8) 16.15,20.8 v1(16.2,20.75)
NetTP_FAULT_1: FAULT.1 U1.13 U3.24 | length 30.6
  TL w0.2: U1.13 8.8,22 9.3,21.5 v1(10.15,21.5) ; v1(16.269,22.031) 16.304,22.065 17.965,22.065 FAULT.1 18.03,22.1 18.4,21.73 18.4,20.831 19.531,19.7 24.55,19.7 25.3,20.45 U3.24
  BL w0.2: v1(10.15,21.5) 15.65,21.5 16.181,22.031 v1(16.269,22.031)
NetTP_HA_1: HA.1 U1.6 U3.20 | length 31.1
  TL w0.2: U1.6 7.65,27.638 8.962,28.95 14.023,28.95 15.32,27.654 16.373,26.6 HA.1 29.791,26.6 34.05,22.341 U3.20
NetTP_HB_1: HB.1 U1.7 U3.19 | length 32.8
  TL w0.2: U1.7 6.973,26.773 6.973,27.873 8.5,29.4 14.215,29.4 15.508,28.108 17.992,28.108 HB.1 18.5,28.1 19.2,27.4 29.556,27.4 34.45,22.506 U3.19
NetTP_HC_1: HC.1 U1.8 U3.18 | length 34.5
  TL w0.2: U1.8 6.173,26.773 6.173,27.873 8.15,29.85 14.6,29.85 14.85,29.6 HC.1 27.922,29.6 34.85,22.672 U3.18
NetTP_PWM_1: PWM.1 U1.12 U3.22 | length 30.2
  TL w0.2: U1.12 8.918,22.8 9.519,22.2 v1(10.808,22.2) ; v1(16.91,23.59) 16.914,23.595 20.995,23.595 PWM.1 21.5,23.6 23.85,21.25 U3.22
  BL w0.2: v1(10.808,22.2) 15.519,22.2 v1(16.91,23.59)
NRST: C3.1 J1.3 R1.1 U1.4 | length 37.1
  TL w0.2: U1.4 9.275,26.625 9.275,25.675 v1(9.3,25.65) ; J1.3 8.7,3.965 8.7,2.032 9.299,1.433 11.833,1.433 13.5,3.1 13.5,4.606 ; v1(12.327,16.95) 12.25,16.873 12.25,8.999 13.5,7.749 13.5,4.606 ; C3.1 R1.1 14.706,4.606 13.5,4.606
  BL w0.2: v1(9.3,25.65) 9.273,25.623 9.273,20.004 v1(12.327,16.95)
SWCLK: J1.4 U1.24 | length 13.6
  TL w0.2: J1.4 8.708,7.027 8.708,8.908 11.65,11.85 U1.24
SWDIO: J1.2 U1.23 | length 17.4
  TL w0.2: J1.2 8.284,6.18 7.549,6.18 7.402,6.327 6.613,6.327 5.533,7.407 5.533,8.983 6.4,9.85 8.4,9.85 10.85,12.3 U1.23
UART_RX: J2.2 U1.20 | length 10.9
  TL w0.2: J2.2 4.21,11.41 8.45,15.65 U1.20
UART_TX: J2.3 U1.19 | length 9.1
  TL w0.2: J2.3 6.108,13.95 7.6,15.442 7.6,18.101 U1.19
VM: C4.2 C6.2 C7.2 C8.2 C9.1 J3.1 Q1.5 Q1.6 Q1.7 Q1.8 Q3.5 Q3.6 Q3.7 Q3.8 Q5.5 Q5.6 Q5.7 Q5.8 U2.1 U3.1 | length 52.4
  TL w0.2: C4.2 C4.2@4.025,39.025 ; U2.1@5.9,39.025 U2.1 ; C9.1 C8.2 31.483,16.983 31.983,16.983 32.952,17.952 U3.1@33.623,17.952 ; C7.2@37.85,37.5 C7.2
  TL w0.4: C4.2@4.025,39.025 U2.1@5.9,39.025 ; U2.1 12.2,38.9 15.15,41.85 37.2,41.85 v1(37.25,41.8) ; C8.2 31.425,16.375 31.425,15.586 31.65,15.361 31.65,13.2 v1(33.35,11.5) ; v1(35.135,9.715) 35.185,9.715 37.5,7.4 v1(37.55,7.4)
  BL w0.4: v1(33.35,11.5) v1(35.135,9.715)
  other v1: 38.9,1.6 46.1,1.6 42.6,1.65 50,1.75 41.35,3.15 44.6,3.3 37.55,4.6 38.25,4.6 38.95,4.6 39.65,4.6 40.35,4.6 42.75,4.8 42.1,5.2 42.75,5.55 42.1,5.9 42.75,6.25 42.1,6.6 42.75,6.95 42.11,7.29 38.25,7.4 39,7.4 39.7,7.4 40.4,7.4 42.9,16.6 42.25,16.9 42.9,17.3 42.25,17.65 42.9,18 42.25,18.4 42.9,18.65 42.9,20 42.25,20.4 42.9,20.75 42.25,21.1 42.9,21.45 42.25,21.8 42.9,22.15 37.6,36.1 38.3,36.1 39,36.1 39.7,36.1 40.4,36.1 44.4,37.1 45.8,37.1 47.25,37.1 43.7,37.55 45.1,37.55 46.55,37.55 44.4,38 45.8,38 47.25,38 43.7,38.45 45.1,38.45 46.55,38.45 37.6,38.9 38.3,38.9 39.05,38.9 39.75,38.9 40.45,38.9 44.4,38.9 45.8,38.9 47.25,38.9 43.7,39.35 45.1,39.35 46.55,39.35 44.4,39.8 45.8,39.8 47.25,39.8 41.75,40 43.7,40.25 45.1,40.25 46.55,40.25 44.4,40.7 45.8,40.7 47.25,40.7 40.6,41.85 44.1,42.1 50.2,42.25
pads on no net: J1.0 J1.6 U1.15 U1.18 U1.21 U1.22 U1.25 U1.30
copper on no net:
  other v1: 22.05,2.1

## Polygon pours and split planes (outlines as drawn)
GND on TL "NONET_L01_P-001" (solid, pour order 17): 0,43.55 0,0 52.2,0 52.2,43.55
VM on TL "NONET_L01_P-001" (solid, pour order 13): 46.85,26.396 52.154,26.396 52.2,26.35 52.2,0 36.75,0 36.75,7.25 37.85,8.35 44.1,8.35 44.1,8.4 44.65,8.95 44.65,15 43.7,15.95 40.524,15.95 39.95,16.524 39.95,22.141 40.659,22.85 43.692,22.85 43.692,23.238
MTR_OUTA on TL "NONET_L01_P-001" (solid, pour order 0): 52.2,12.95 49.1,12.95 47.6,11.45 44.5,11.45 44.5,9.25 46.35,7.4 46.25,7.3 46.25,5.05 46.95,4.35 52.2,4.35
VM on TL "NONET_L01_P-001" (solid, pour order 16): 36.8,43.55 36.8,36.3 37.6,35.5 41.65,35.5 42.4,36.25 52.15,36.25 52.2,43.55
NetQ2_1 on TL "NONET_L01_P-001" (solid, pour order 14): 46.904,28.847 48,27.751 48,26.36 44.59,22.95 42.5,22.95 41.65,22.1 41.65,16.9 42.65,15.9 43.6,15.9 44.5,15 44.5,8.925 43.925,8.35 42.3,8.35 39.65,11 39.65,27.45 41.133,28.933
NetQ2_1 on TL "NONET_L01_P-001" (solid, pour order 6): 41.65,12.8 42.3,12.15 44.1,12.15 44.1,14.9 43.35,15.65 42,15.65 41.65,15.3
NetQ2_1 on TL "NONET_L01_P-001" (solid, pour order 5): 41.65,9 42.3,8.35 44.1,8.35 44.1,11.1 43.35,11.85 42,11.85 41.65,11.5
NetQ2_1 on TL "NONET_L01_P-001" (solid, pour order 7): 41.65,23.9 42.3,23.25 44.1,23.25 44.1,26 43.35,26.75 42,26.75 41.65,26.4
MTR_OUTC on TL "NONET_L01_P-001" (solid, pour order 2): 46.3,19.55 47.95,17.9 52.2,17.9 52.2,26.35 52.1,26.25 44.5,26.25 44.5,23.25 44.55,23.3 45.3,23.3 46.3,22.3
MTR_OUTB on TL "NONET_L01_P-001" (solid, pour order 1): 44.5,12.15 48.3,12.15 49.1,12.95 52.2,12.95 52.2,17.9 47.95,17.9 46.298,17.9 46.298,15.948 44.5,14.15
GND on BL "NONET_L01_P-001" (solid, pour order 18): 0,43.55 0,0 52.2,0 52.2,43.55
VM on BL "NONET_L01_P-001" (solid, pour order 8): 36.75,7.25 37.85,8.35 43.925,8.35 44.5,8.925 44.5,15 43.6,15.9 42.65,15.9 41.65,16.9 41.65,22.1 42.5,22.95 43.4,22.95 46.7,26.25 46.7,32.95 44.65,35 38.15,35 36.8,36.35 36.8,43.55 52.2,43.55 52.2,0 36.75,0
NetQ2_1 on BL "NONET_L01_P-001" (solid, pour order 4): 47.451,28.839 47.561,28.839 47.95,28.45 47.95,26.35 44.55,22.95 42.5,22.95 41.65,22.1 41.65,16.9 42.65,15.9 43.6,15.9 44.5,15 44.5,8.925 43.925,8.35 42.3,8.35 39.65,11 39.65,27.5 41.084,28.934

## Keep-outs
Keep-Out Layer:
  the board outline again, w0.254

## Other copper
TL:
  pour cut-out: 38.75,30.85 38.55,31.05 37.95,31.05 37.75,30.85 37.75,29.85 37.9,29.7 38.55,29.7 38.75,29.9

## Silkscreen, mask and mechanical layers (free items; w line width, h text height)
Top Overlay:
  text "V+" at 46.196,38.504 h1.52 r90
  text "Tx" at 3.704,13.304 h1.52
  text "Rx" at 3.754,10.704 h1.52
  text "G" at 3.704,8.154 h1.52
Bottom Overlay:
  text "Lambo" at 40.496,3.154 h1.52
  text "ESC dev board v1.0" at 40.496,0.954 h1.52
MechOutline (Mech31):
  the board outline again, w0.254